# EAGLE board Qwiic_USB_Bridge_SAMD21E-Panel (EAGLE 9.5.2), part 1 of 2
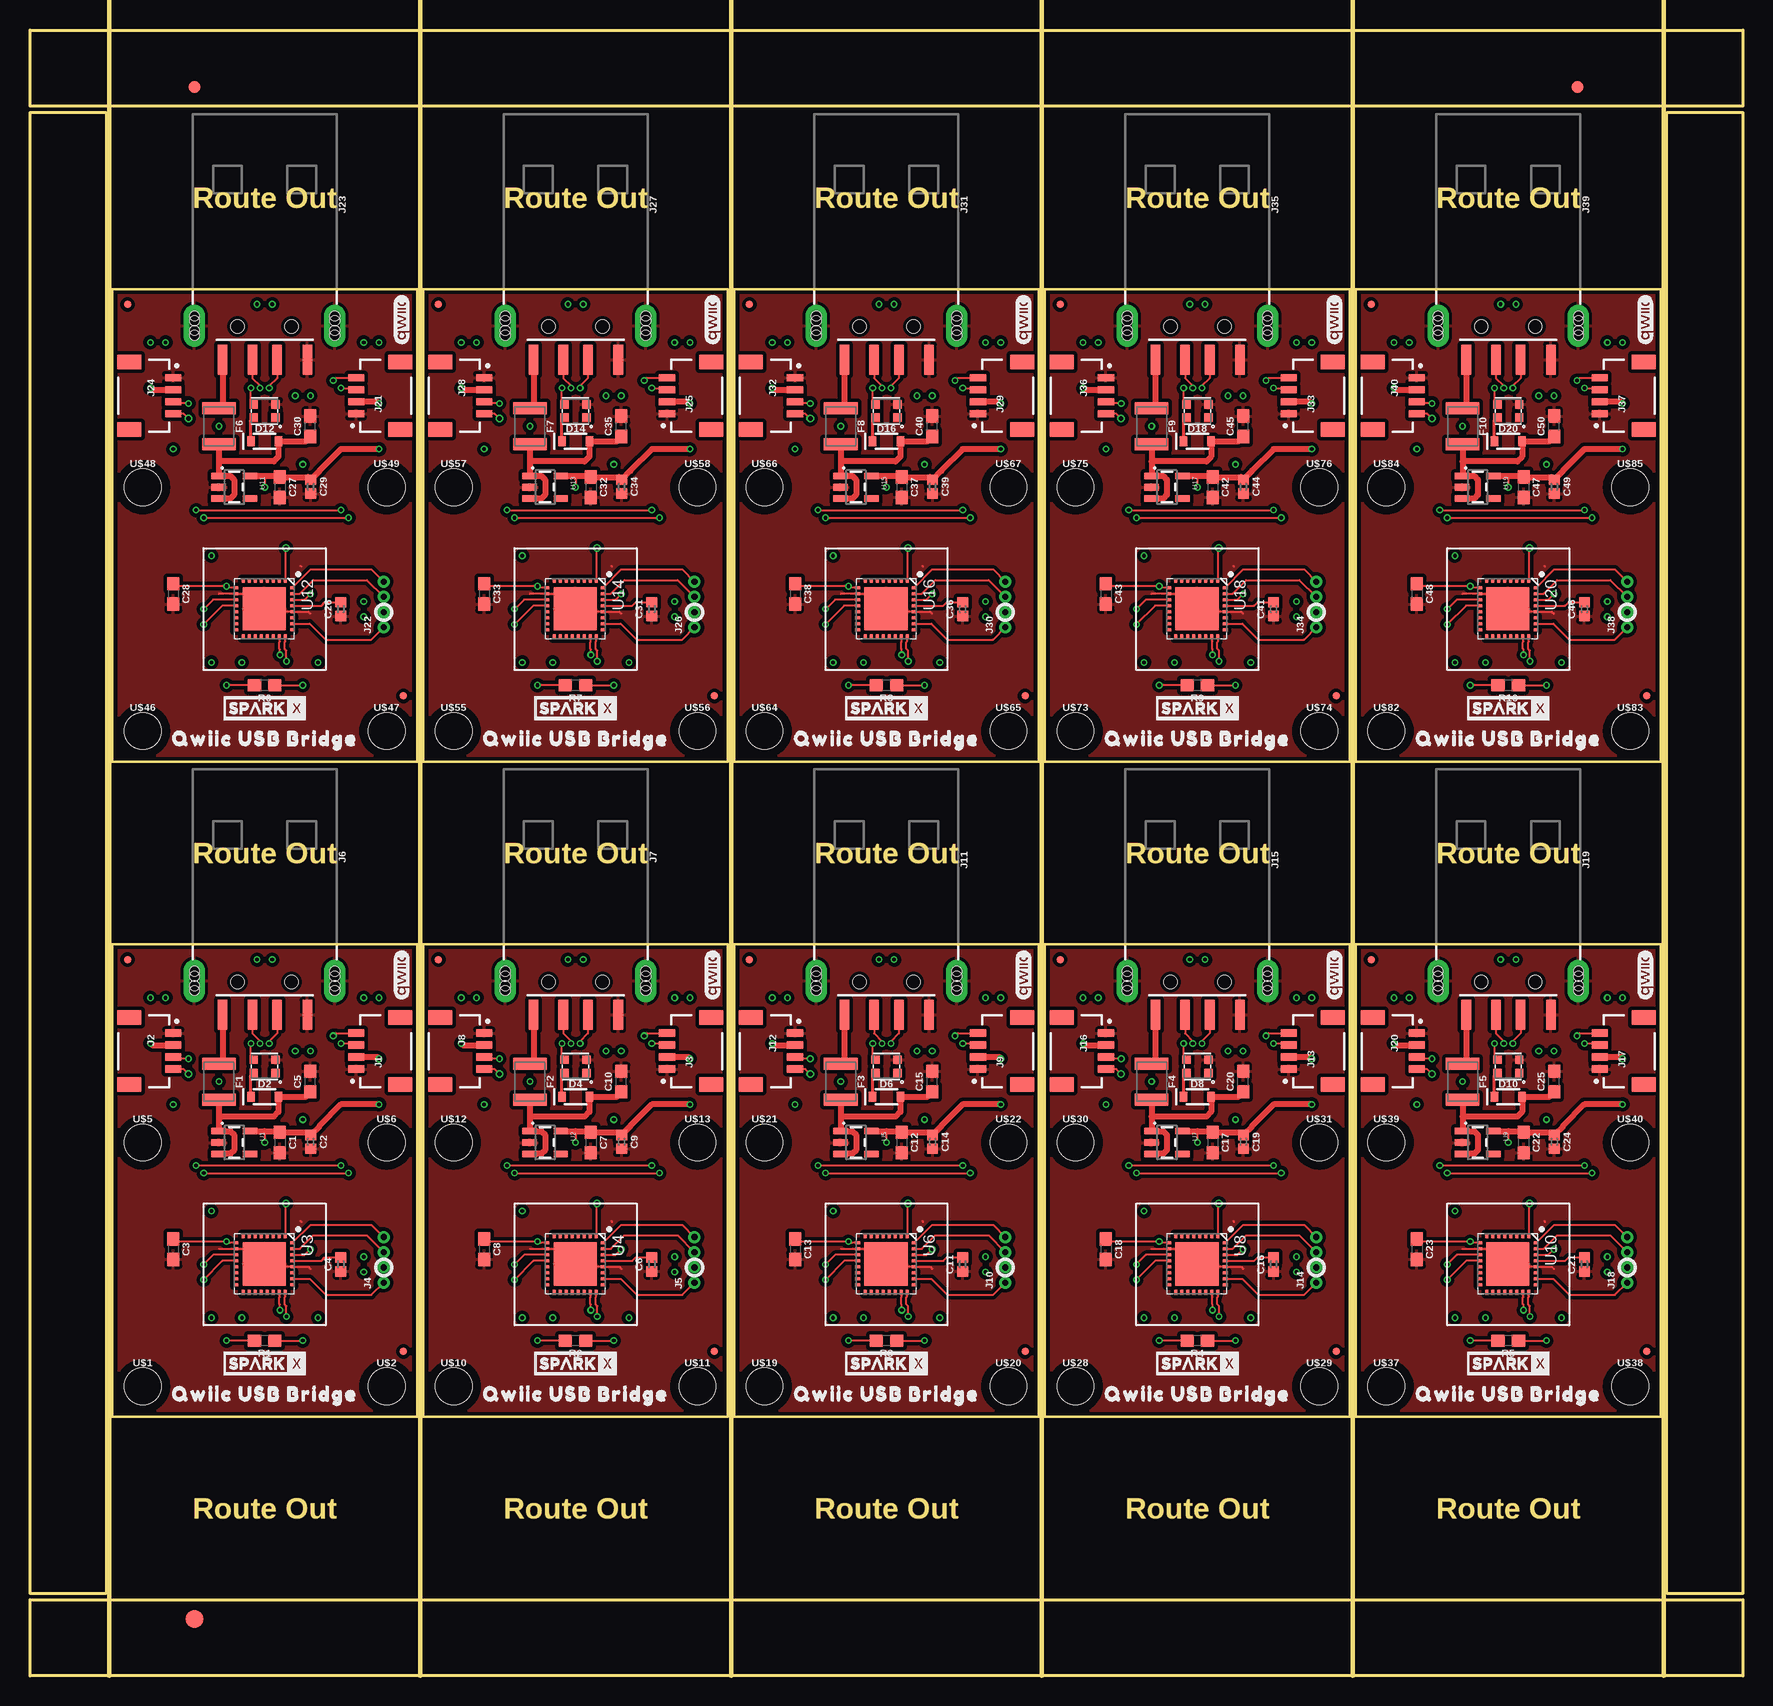
[diagram p0: board, top side]
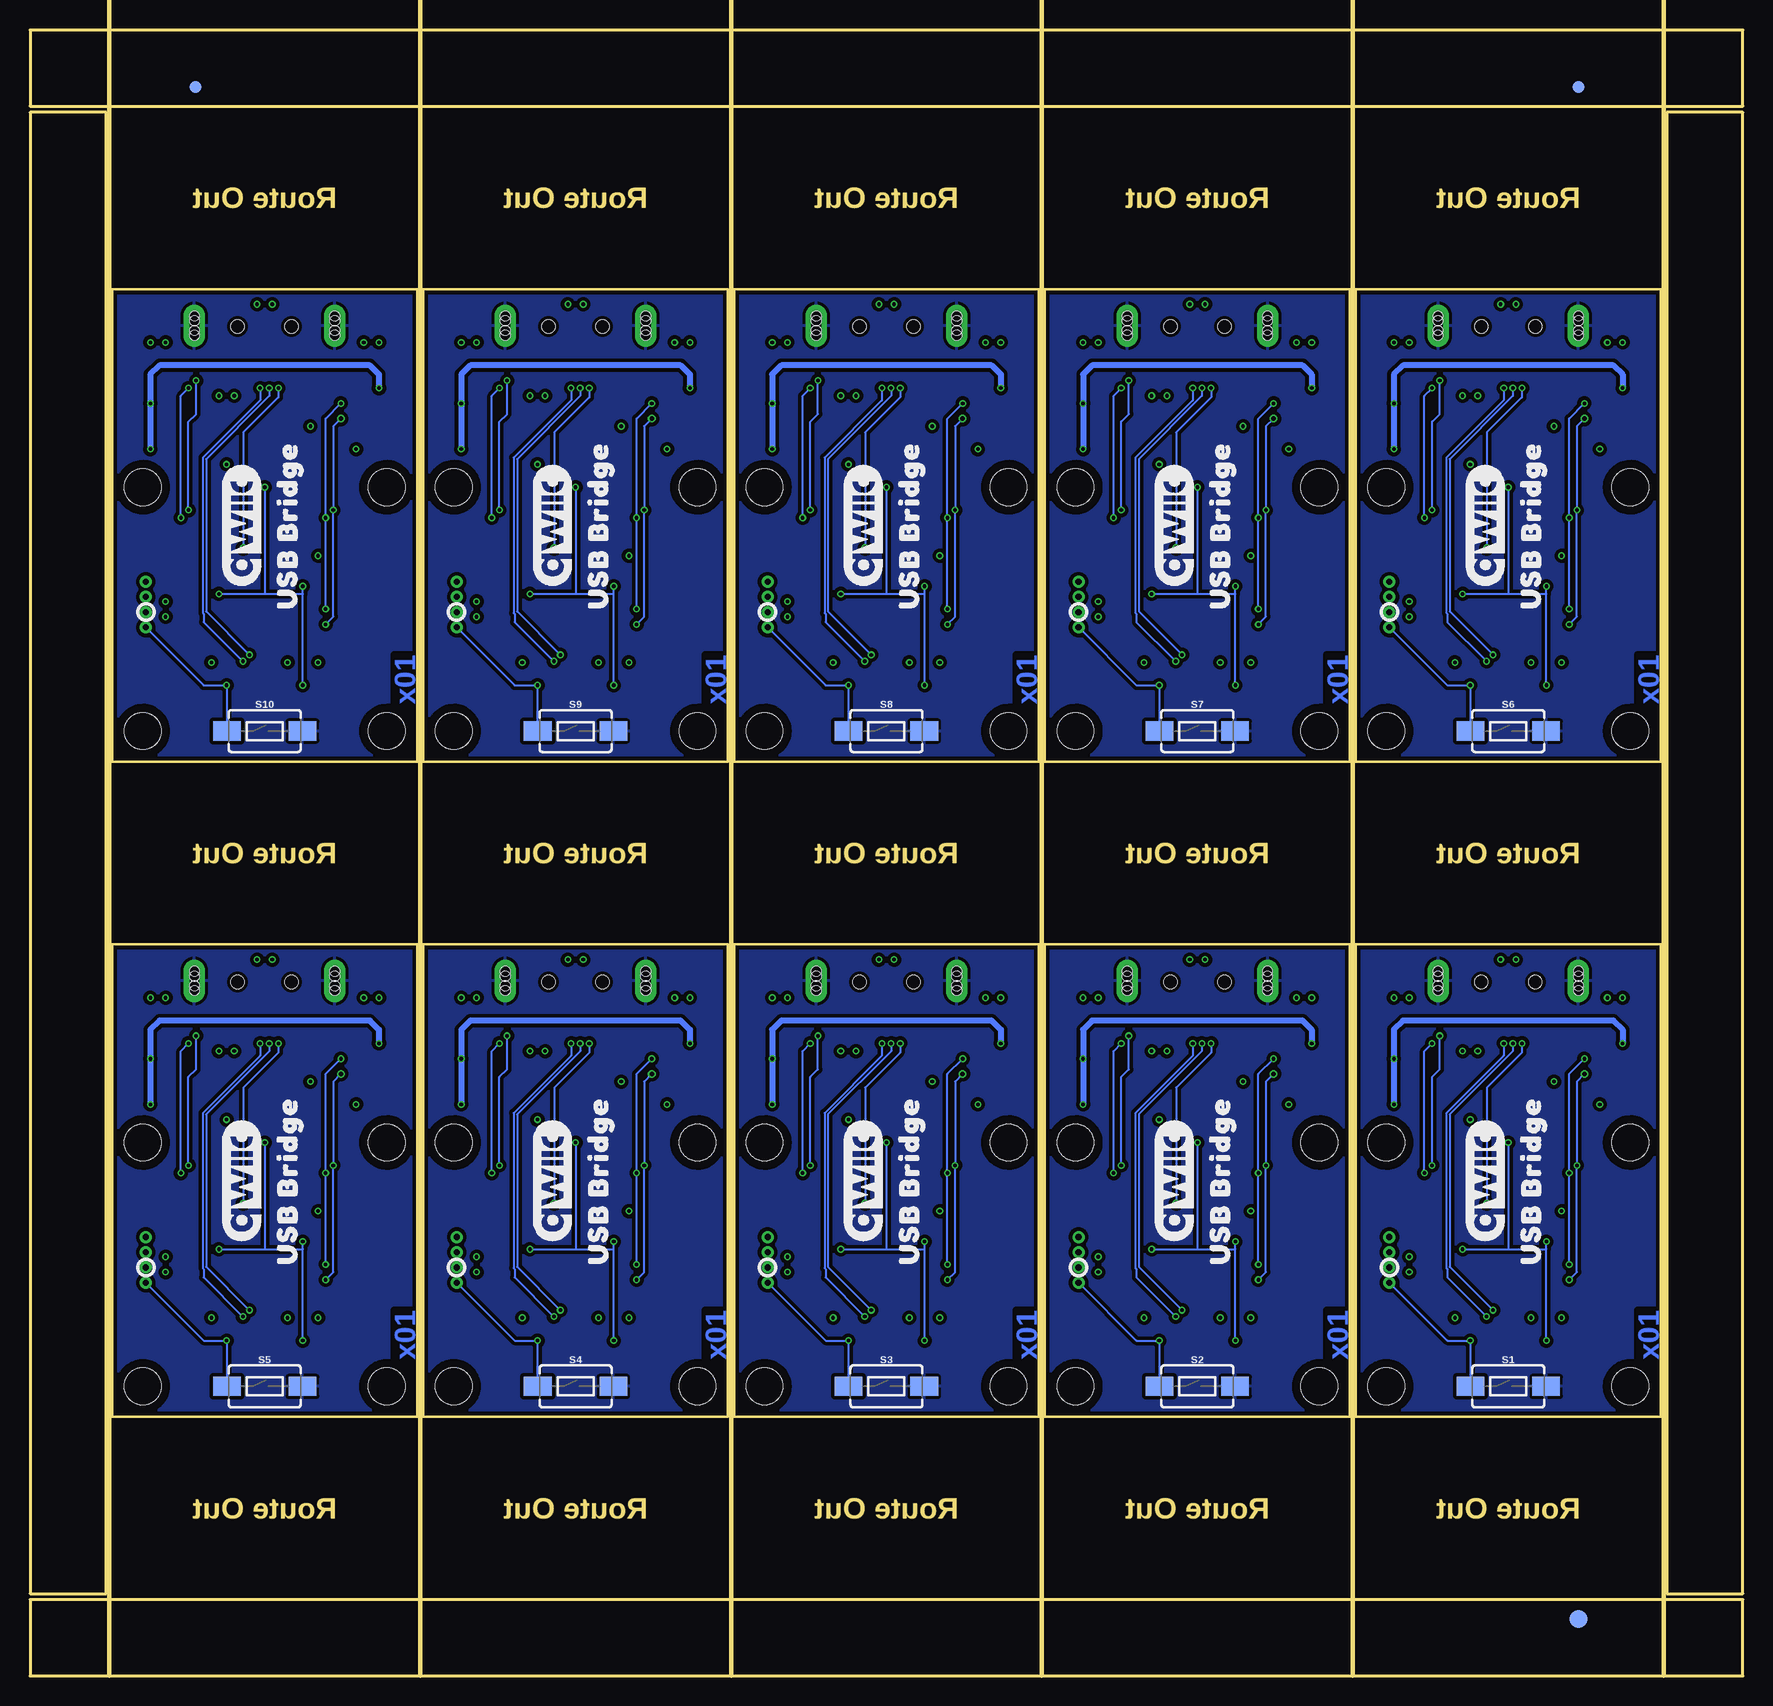
[diagram p1: board, bottom side, seen from below]

Size 142.75 x 137.16 mm. Coordinates in mm from the lower left corner, seen from the top.
Outline: 6.86,21.59 32.26,21.59 32.26,60.96 6.86,60.96 6.86,21.59
Outline: 32.77,21.59 58.17,21.59 58.17,60.96 32.77,60.96 32.77,21.59
Outline: 58.67,21.59 84.07,21.59 84.07,60.96 58.67,60.96 58.67,21.59
Outline: 84.58,21.59 109.98,21.59 109.98,60.96 84.58,60.96 84.58,21.59
Outline: 110.49,21.59 135.89,21.59 135.89,60.96 110.49,60.96 110.49,21.59
Outline: 6.86,76.2 32.26,76.2 32.26,115.57 6.86,115.57 6.86,76.2
Outline: 32.77,76.2 58.17,76.2 58.17,115.57 32.77,115.57 32.77,76.2
Outline: 58.67,76.2 84.07,76.2 84.07,115.57 58.67,115.57 58.67,76.2
Outline: 84.58,76.2 109.98,76.2 109.98,115.57 84.58,115.57 84.58,76.2
Outline: 110.49,76.2 135.89,76.2 135.89,115.57 110.49,115.57 110.49,76.2
Outline: 0,6.35 142.75,6.35 142.75,0 0,0 0,6.35
Outline: 136.4,130.3 142.75,130.3 142.75,6.86 136.4,6.86 136.4,130.3
Outline: 0,137.16 142.75,137.16 142.75,130.81 0,130.81 0,137.16
Outline: 0,130.3 6.35,130.3 6.35,6.86 0,6.86 0,130.3
Copper layers (1*16): Top 0.035mm / dielectric 1.5mm / Bottom 0.035mm
Design rules "Qwiic_USB_Bridge_SAMD21E": minimum track width 5mil, minimum drill 0.3mm, track to track 5mil, track to pad 5mil, pad to pad 5mil, via to via 5mil, smd to smd 5mil, copper to edge 7mil, drill to drill 7mil, minimum pad ring 5mil, minimum via ring 5mil, stop-mask expansion 4mil, vias tented up to drill 25mil, thermal gap 10mil
Milling: 6 lines

## Footprints (pad centres in the part's own frame; a part is rotated, then mirrored left to right if it is on the bottom)
0603 = smd 1.1 x 1: 1 -0.85,0; 2 0.85,0
0402 = smd 0.85 x 0.9: 1 -0.58,0; 2 0.58,0
WS2812-2020 = smd 0.7 x 0.7: DI -0.915,0.55; DO 0.915,-0.55; GND 0.915,0.55; VCC -0.915,-0.55
SOD-323 = smd 0.63 x 0.83: A 1.15,0; C -1.15,0
FIDUCIAL-1X2 = smd 1 x 1: 1 0,0
FIDUCIAL-1.5X3 = smd 1.5 x 1.5: 1 0,0
1210 = smd 1 x 2.8: 1 -1.5,0; 2 1.5,0
FIDUCIAL-MICRO = smd 0.635 x 0.635: 1 0,0
JST04_1MM_RA = smd 0.6 x 1.35: 1 -1.5,0; 2 -0.5,0; 3 0.5,0; 4 1.5,0 | smd 1.2 x 2: NC1 2.8,-3.675; NC2 -2.8,-3.675
1X04_1.27MM_NO_SILK = drill 0.508 pad 1: 1 0,0; 2 1.27,0; 3 2.54,0; 4 3.81,0
USB-A-SMT-MALE = smd 2.5 x 0.8: D+1 10.95,1.027; D-1 10.95,-1.027; GND1 10.95,3.551; VBUS1 10.95,-3.5 | drill 0.8 pad 1.778 long: SHLD1 8.13,-5.85; SHLD2 8.13,5.85 | hole 1.1: 8.2,2.25; 8.2,-2.25 | hole 0.8: 8.53,-5.85; 8.93,-5.85; 7.73,-5.85; 7.33,-5.85; 8.53,5.85; 8.93,5.85; 7.73,5.85; 7.33,5.85
TACTILE_SWITCH_SMD_6.0X3.5MM = smd 2.3 x 1.6: 1 -3.15,0; 2 3.15,0
SOT23-5 = smd 0.55 x 1.2: 1 -0.95,-1.3; 2 0,-1.3; 3 0.95,-1.3; 4 0.95,1.3; 5 -0.95,1.3
QFN-32_SAMD = smd 0.25 x 0.4: GND 0.21,2.31; GNDANA -1.29,-2.39; PA08 -0.79,-2.39; PA09 -0.29,-2.39; PA10 0.21,-2.39; PA11 0.71,-2.39; PA14 1.21,-2.39; PA15 1.71,-2.39; PA27 1.71,2.31; PA28 0.71,2.31; PA30 -1.29,2.31; PA31 -1.79,2.31; RES 1.21,2.31; VDD -1.79,-2.39; VDDCORE -0.29,2.31; VDDIN -0.79,2.31 | smd 0.4 x 0.25: PA00 -2.39,1.71; PA01 -2.39,1.21; PA02 -2.39,0.71; PA03 -2.39,0.21; PA04 -2.39,-0.29; PA05 -2.39,-0.79; PA06 -2.39,-1.29; PA07 -2.39,-1.79; PA16 2.31,-1.79; PA17 2.31,-1.29; PA18 2.31,-0.79; PA19 2.31,-0.29; PA22 2.31,0.21; PA23 2.31,0.71; PA24 2.31,1.21; PA25 2.31,1.71 | smd 3.6 x 3.6: PAD -0.04,-0.04
STAND-OFF-TIGHT = hole 3.048: 0,0

## Placement (x,y rotation side)
C1  10uF  [0603]  20.83,44.45 270 top
C2  1.0uF  [0402]  23.39,44.5 270 top
C3  10uF  [0603]  11.94,35.56 270 top
C4  1.0uF  [0402]  25.91,34.29 90 top
C5  0.1uF  [0603]  23.37,49.53 90 top
C6  1.0uF  [0402]  51.82,34.29 90 top
C7  10uF  [0603]  46.74,44.45 270 top
C8  10uF  [0603]  37.85,35.56 270 top
C9  1.0uF  [0402]  49.3,44.5 270 top
C10  0.1uF  [0603]  49.28,49.53 90 top
C11  1.0uF  [0402]  77.72,34.29 90 top
C12  10uF  [0603]  72.64,44.45 270 top
C13  10uF  [0603]  63.75,35.56 270 top
C14  1.0uF  [0402]  75.21,44.5 270 top
C15  0.1uF  [0603]  75.18,49.53 90 top
C16  1.0uF  [0402]  103.63,34.29 90 top
C17  10uF  [0603]  98.55,44.45 270 top
C18  10uF  [0603]  89.66,35.56 270 top
C19  1.0uF  [0402]  101.12,44.5 270 top
C20  0.1uF  [0603]  101.09,49.53 90 top
C21  1.0uF  [0402]  129.54,34.29 90 top
C22  10uF  [0603]  124.46,44.45 270 top
C23  10uF  [0603]  115.57,35.56 270 top
C24  1.0uF  [0402]  127.03,44.5 270 top
C25  0.1uF  [0603]  127,49.53 90 top
C26  1.0uF  [0402]  25.91,88.9 90 top
C27  10uF  [0603]  20.83,99.06 270 top
C28  10uF  [0603]  11.94,90.17 270 top
C29  1.0uF  [0402]  23.39,99.11 270 top
C30  0.1uF  [0603]  23.37,104.14 90 top
C31  1.0uF  [0402]  51.82,88.9 90 top
C32  10uF  [0603]  46.74,99.06 270 top
C33  10uF  [0603]  37.85,90.17 270 top
C34  1.0uF  [0402]  49.3,99.11 270 top
C35  0.1uF  [0603]  49.28,104.14 90 top
C36  1.0uF  [0402]  77.72,88.9 90 top
C37  10uF  [0603]  72.64,99.06 270 top
C38  10uF  [0603]  63.75,90.17 270 top
C39  1.0uF  [0402]  75.21,99.11 270 top
C40  0.1uF  [0603]  75.18,104.14 90 top
C41  1.0uF  [0402]  103.63,88.9 90 top
C42  10uF  [0603]  98.55,99.06 270 top
C43  10uF  [0603]  89.66,90.17 270 top
C44  1.0uF  [0402]  101.12,99.11 270 top
C45  0.1uF  [0603]  101.09,104.14 90 top
C46  1.0uF  [0402]  129.54,88.9 90 top
C47  10uF  [0603]  124.46,99.06 270 top
C48  10uF  [0603]  115.57,90.17 270 top
C49  1.0uF  [0402]  127.03,99.11 270 top
C50  0.1uF  [0603]  127,104.14 90 top
D1  WS2812_2020  [WS2812-2020]  19.56,50.8 0 top
D2  250mA/100V  [SOD-323]  19.56,48.26 0 top
D3  WS2812_2020  [WS2812-2020]  45.47,50.8 0 top
D4  250mA/100V  [SOD-323]  45.47,48.26 0 top
D5  WS2812_2020  [WS2812-2020]  71.37,50.8 0 top
D6  250mA/100V  [SOD-323]  71.37,48.26 0 top
D7  WS2812_2020  [WS2812-2020]  97.28,50.8 0 top
D8  250mA/100V  [SOD-323]  97.28,48.26 0 top
D9  WS2812_2020  [WS2812-2020]  123.19,50.8 0 top
D10  250mA/100V  [SOD-323]  123.19,48.26 0 top
D11  WS2812_2020  [WS2812-2020]  19.56,105.41 0 top
D12  250mA/100V  [SOD-323]  19.56,102.87 0 top
D13  WS2812_2020  [WS2812-2020]  45.47,105.41 0 top
D14  250mA/100V  [SOD-323]  45.47,102.87 0 top
D15  WS2812_2020  [WS2812-2020]  71.37,105.41 0 top
D16  250mA/100V  [SOD-323]  71.37,102.87 0 top
D17  WS2812_2020  [WS2812-2020]  97.28,105.41 0 top
D18  250mA/100V  [SOD-323]  97.28,102.87 0 top
D19  WS2812_2020  [WS2812-2020]  123.19,105.41 0 top
D20  250mA/100V  [SOD-323]  123.19,102.87 0 top
E$1  [FIDUCIAL-1X2]  13.72,132.4 0 top
E$2  [FIDUCIAL-1X2]  13.72,132.4 0 bottom
E$3  [FIDUCIAL-1X2]  128.97,132.4 0 top
E$4  [FIDUCIAL-1X2]  128.97,132.4 0 bottom
E$5  [FIDUCIAL-1.5X3]  13.72,4.76 0 top
E$6  [FIDUCIAL-1.5X3]  13.72,4.76 0 bottom
F1  6V/2A  [1210]  15.75,49.53 270 top
F2  6V/2A  [1210]  41.66,49.53 270 top
F3  6V/2A  [1210]  67.56,49.53 270 top
F4  6V/2A  [1210]  93.47,49.53 270 top
F5  6V/2A  [1210]  119.38,49.53 270 top
F6  6V/2A  [1210]  15.75,104.14 270 top
F7  6V/2A  [1210]  41.66,104.14 270 top
F8  6V/2A  [1210]  67.56,104.14 270 top
F9  6V/2A  [1210]  93.47,104.14 270 top
F10  6V/2A  [1210]  119.38,104.14 270 top
FD1  FIDUCIALUFIDUCIAL  [FIDUCIAL-MICRO]  8.13,59.69 0 top
FD2  FIDUCIALUFIDUCIAL  [FIDUCIAL-MICRO]  31.12,27.05 0 top
FD3  FIDUCIALUFIDUCIAL  [FIDUCIAL-MICRO]  34.04,59.69 0 top
FD4  FIDUCIALUFIDUCIAL  [FIDUCIAL-MICRO]  57.02,27.05 0 top
FD5  FIDUCIALUFIDUCIAL  [FIDUCIAL-MICRO]  59.94,59.69 0 top
FD6  FIDUCIALUFIDUCIAL  [FIDUCIAL-MICRO]  82.93,27.05 0 top
FD7  FIDUCIALUFIDUCIAL  [FIDUCIAL-MICRO]  85.85,59.69 0 top
FD8  FIDUCIALUFIDUCIAL  [FIDUCIAL-MICRO]  108.84,27.05 0 top
FD9  FIDUCIALUFIDUCIAL  [FIDUCIAL-MICRO]  111.76,59.69 0 top
FD10  FIDUCIALUFIDUCIAL  [FIDUCIAL-MICRO]  134.75,27.05 0 top
FD11  FIDUCIALUFIDUCIAL  [FIDUCIAL-MICRO]  8.13,114.3 0 top
FD12  FIDUCIALUFIDUCIAL  [FIDUCIAL-MICRO]  31.12,81.66 0 top
FD13  FIDUCIALUFIDUCIAL  [FIDUCIAL-MICRO]  34.04,114.3 0 top
FD14  FIDUCIALUFIDUCIAL  [FIDUCIAL-MICRO]  57.02,81.66 0 top
FD15  FIDUCIALUFIDUCIAL  [FIDUCIAL-MICRO]  59.94,114.3 0 top
FD16  FIDUCIALUFIDUCIAL  [FIDUCIAL-MICRO]  82.93,81.66 0 top
FD17  FIDUCIALUFIDUCIAL  [FIDUCIAL-MICRO]  85.85,114.3 0 top
FD18  FIDUCIALUFIDUCIAL  [FIDUCIAL-MICRO]  108.84,81.66 0 top
FD19  FIDUCIALUFIDUCIAL  [FIDUCIAL-MICRO]  111.76,114.3 0 top
FD20  FIDUCIALUFIDUCIAL  [FIDUCIAL-MICRO]  134.75,81.66 0 top
J1  QWIIC_RIGHT_ANGLE  [JST04_1MM_RA]  27.18,52.07 90 top
J2  QWIIC_RIGHT_ANGLE  [JST04_1MM_RA]  11.94,52.07 270 top
J3  QWIIC_RIGHT_ANGLE  [JST04_1MM_RA]  53.09,52.07 90 top
J4  [1X04_1.27MM_NO_SILK]  29.46,32.77 90 top
J5  [1X04_1.27MM_NO_SILK]  55.37,32.77 90 top
J6  USB_A_SMT_MALE  [USB-A-SMT-MALE]  19.56,66.04 270 top
J7  USB_A_SMT_MALE  [USB-A-SMT-MALE]  45.47,66.04 270 top
J8  QWIIC_RIGHT_ANGLE  [JST04_1MM_RA]  37.85,52.07 270 top
J9  QWIIC_RIGHT_ANGLE  [JST04_1MM_RA]  78.99,52.07 90 top
J10  [1X04_1.27MM_NO_SILK]  81.28,32.77 90 top
J11  USB_A_SMT_MALE  [USB-A-SMT-MALE]  71.37,66.04 270 top
J12  QWIIC_RIGHT_ANGLE  [JST04_1MM_RA]  63.75,52.07 270 top
J13  QWIIC_RIGHT_ANGLE  [JST04_1MM_RA]  104.9,52.07 90 top
J14  [1X04_1.27MM_NO_SILK]  107.19,32.77 90 top
J15  USB_A_SMT_MALE  [USB-A-SMT-MALE]  97.28,66.04 270 top
J16  QWIIC_RIGHT_ANGLE  [JST04_1MM_RA]  89.66,52.07 270 top
J17  QWIIC_RIGHT_ANGLE  [JST04_1MM_RA]  130.81,52.07 90 top
J18  [1X04_1.27MM_NO_SILK]  133.1,32.77 90 top
J19  USB_A_SMT_MALE  [USB-A-SMT-MALE]  123.19,66.04 270 top
J20  QWIIC_RIGHT_ANGLE  [JST04_1MM_RA]  115.57,52.07 270 top
J21  QWIIC_RIGHT_ANGLE  [JST04_1MM_RA]  27.18,106.68 90 top
J22  [1X04_1.27MM_NO_SILK]  29.46,87.38 90 top
J23  USB_A_SMT_MALE  [USB-A-SMT-MALE]  19.56,120.65 270 top
J24  QWIIC_RIGHT_ANGLE  [JST04_1MM_RA]  11.94,106.68 270 top
J25  QWIIC_RIGHT_ANGLE  [JST04_1MM_RA]  53.09,106.68 90 top
J26  [1X04_1.27MM_NO_SILK]  55.37,87.38 90 top
J27  USB_A_SMT_MALE  [USB-A-SMT-MALE]  45.47,120.65 270 top
J28  QWIIC_RIGHT_ANGLE  [JST04_1MM_RA]  37.85,106.68 270 top
J29  QWIIC_RIGHT_ANGLE  [JST04_1MM_RA]  78.99,106.68 90 top
J30  [1X04_1.27MM_NO_SILK]  81.28,87.38 90 top
J31  USB_A_SMT_MALE  [USB-A-SMT-MALE]  71.37,120.65 270 top
J32  QWIIC_RIGHT_ANGLE  [JST04_1MM_RA]  63.75,106.68 270 top
J33  QWIIC_RIGHT_ANGLE  [JST04_1MM_RA]  104.9,106.68 90 top
J34  [1X04_1.27MM_NO_SILK]  107.19,87.38 90 top
J35  USB_A_SMT_MALE  [USB-A-SMT-MALE]  97.28,120.65 270 top
J36  QWIIC_RIGHT_ANGLE  [JST04_1MM_RA]  89.66,106.68 270 top
J37  QWIIC_RIGHT_ANGLE  [JST04_1MM_RA]  130.81,106.68 90 top
J38  [1X04_1.27MM_NO_SILK]  133.1,87.38 90 top
J39  USB_A_SMT_MALE  [USB-A-SMT-MALE]  123.19,120.65 270 top
J40  QWIIC_RIGHT_ANGLE  [JST04_1MM_RA]  115.57,106.68 270 top
R1  10k  [0603]  19.56,27.94 180 top
R2  10k  [0603]  45.47,27.94 180 top
R3  10k  [0603]  71.37,27.94 180 top
R4  10k  [0603]  97.28,27.94 180 top
R5  10k  [0603]  123.19,27.94 180 top
R6  10k  [0603]  19.56,82.55 180 top
R7  10k  [0603]  45.47,82.55 180 top
R8  10k  [0603]  71.37,82.55 180 top
R9  10k  [0603]  97.28,82.55 180 top
R10  10k  [0603]  123.19,82.55 180 top
S1  MOMENTARY-SWITCH-SPST-SMD-6.0X3.5MM  [TACTILE_SWITCH_SMD_6.0X3.5MM]  19.56,24.13 0 bottom
S2  MOMENTARY-SWITCH-SPST-SMD-6.0X3.5MM  [TACTILE_SWITCH_SMD_6.0X3.5MM]  45.47,24.13 0 bottom
S3  MOMENTARY-SWITCH-SPST-SMD-6.0X3.5MM  [TACTILE_SWITCH_SMD_6.0X3.5MM]  71.37,24.13 0 bottom
S4  MOMENTARY-SWITCH-SPST-SMD-6.0X3.5MM  [TACTILE_SWITCH_SMD_6.0X3.5MM]  97.28,24.13 0 bottom
S5  MOMENTARY-SWITCH-SPST-SMD-6.0X3.5MM  [TACTILE_SWITCH_SMD_6.0X3.5MM]  123.19,24.13 0 bottom
S6  MOMENTARY-SWITCH-SPST-SMD-6.0X3.5MM  [TACTILE_SWITCH_SMD_6.0X3.5MM]  19.56,78.74 0 bottom
S7  MOMENTARY-SWITCH-SPST-SMD-6.0X3.5MM  [TACTILE_SWITCH_SMD_6.0X3.5MM]  45.47,78.74 0 bottom
S8  MOMENTARY-SWITCH-SPST-SMD-6.0X3.5MM  [TACTILE_SWITCH_SMD_6.0X3.5MM]  71.37,78.74 0 bottom
S9  MOMENTARY-SWITCH-SPST-SMD-6.0X3.5MM  [TACTILE_SWITCH_SMD_6.0X3.5MM]  97.28,78.74 0 bottom
S10  MOMENTARY-SWITCH-SPST-SMD-6.0X3.5MM  [TACTILE_SWITCH_SMD_6.0X3.5MM]  123.19,78.74 0 bottom
U1  3.3V  [SOT23-5]  17.02,44.45 270 top
U2  3.3V  [SOT23-5]  42.93,44.45 270 top
U3  ATSAMD21E18A-U  [QFN-32_SAMD]  19.56,34.29 270 top
U4  ATSAMD21E18A-U  [QFN-32_SAMD]  45.47,34.29 270 top
U5  3.3V  [SOT23-5]  68.83,44.45 270 top
U6  ATSAMD21E18A-U  [QFN-32_SAMD]  71.37,34.29 270 top
U7  3.3V  [SOT23-5]  94.74,44.45 270 top
U8  ATSAMD21E18A-U  [QFN-32_SAMD]  97.28,34.29 270 top
U9  3.3V  [SOT23-5]  120.65,44.45 270 top
U10  ATSAMD21E18A-U  [QFN-32_SAMD]  123.19,34.29 270 top
U11  3.3V  [SOT23-5]  17.02,99.06 270 top
U12  ATSAMD21E18A-U  [QFN-32_SAMD]  19.56,88.9 270 top
U13  3.3V  [SOT23-5]  42.93,99.06 270 top
U14  ATSAMD21E18A-U  [QFN-32_SAMD]  45.47,88.9 270 top
U15  3.3V  [SOT23-5]  68.83,99.06 270 top
U16  ATSAMD21E18A-U  [QFN-32_SAMD]  71.37,88.9 270 top
U17  3.3V  [SOT23-5]  94.74,99.06 270 top
U18  ATSAMD21E18A-U  [QFN-32_SAMD]  97.28,88.9 270 top
U19  3.3V  [SOT23-5]  120.65,99.06 270 top
U20  ATSAMD21E18A-U  [QFN-32_SAMD]  123.19,88.9 270 top
U$1  [STAND-OFF-TIGHT]  9.4,24.13 0 top
U$2  [STAND-OFF-TIGHT]  29.72,24.13 0 top
U$3  [QWIIC_USB_BRIDGE0]  19.56,23.5 0 top
U$4  [SPARKX-SMALL]  19.56,26.04 0 top
U$5  [STAND-OFF-TIGHT]  9.4,44.45 0 top
U$6  [STAND-OFF-TIGHT]  29.72,44.45 0 top
U$7  [QWIIC_10MM]  21.46,41.27 90 bottom
U$8  [USB_BRIDGE0]  17.65,41.27 90 bottom
U$9  [QWIIC_4MM]  30.99,58.42 90 top
U$10  [STAND-OFF-TIGHT]  35.31,24.13 0 top
U$11  [STAND-OFF-TIGHT]  55.63,24.13 0 top
U$12  [STAND-OFF-TIGHT]  35.31,44.45 0 top
U$13  [STAND-OFF-TIGHT]  55.63,44.45 0 top
U$14  [QWIIC_USB_BRIDGE0]  45.47,23.5 0 top
U$15  [SPARKX-SMALL]  45.47,26.04 0 top
U$16  [QWIIC_10MM]  47.37,41.27 90 bottom
U$17  [USB_BRIDGE0]  43.56,41.27 90 bottom
U$18  [QWIIC_4MM]  56.9,58.42 90 top
U$19  [STAND-OFF-TIGHT]  61.21,24.13 0 top
U$20  [STAND-OFF-TIGHT]  81.53,24.13 0 top
U$21  [STAND-OFF-TIGHT]  61.21,44.45 0 top
U$22  [STAND-OFF-TIGHT]  81.53,44.45 0 top
U$23  [QWIIC_USB_BRIDGE0]  71.37,23.5 0 top
U$24  [SPARKX-SMALL]  71.37,26.04 0 top
U$25  [QWIIC_10MM]  73.28,41.27 90 bottom
U$26  [USB_BRIDGE0]  69.47,41.27 90 bottom
U$27  [QWIIC_4MM]  82.8,58.42 90 top
U$28  [STAND-OFF-TIGHT]  87.12,24.13 0 top
U$29  [STAND-OFF-TIGHT]  107.44,24.13 0 top
U$30  [STAND-OFF-TIGHT]  87.12,44.45 0 top
U$31  [STAND-OFF-TIGHT]  107.44,44.45 0 top
U$32  [QWIIC_USB_BRIDGE0]  97.28,23.5 0 top
U$33  [SPARKX-SMALL]  97.28,26.04 0 top
U$34  [QWIIC_10MM]  99.19,41.27 90 bottom
U$35  [USB_BRIDGE0]  95.38,41.27 90 bottom
U$36  [QWIIC_4MM]  108.71,58.42 90 top
U$37  [STAND-OFF-TIGHT]  113.03,24.13 0 top
U$38  [STAND-OFF-TIGHT]  133.35,24.13 0 top
U$39  [STAND-OFF-TIGHT]  113.03,44.45 0 top
U$40  [STAND-OFF-TIGHT]  133.35,44.45 0 top
U$41  [QWIIC_USB_BRIDGE0]  123.19,23.5 0 top
U$42  [SPARKX-SMALL]  123.19,26.04 0 top
U$43  [QWIIC_10MM]  125.09,41.27 90 bottom
U$44  [USB_BRIDGE0]  121.29,41.27 90 bottom
U$45  [QWIIC_4MM]  134.62,58.42 90 top
U$46  [STAND-OFF-TIGHT]  9.4,78.74 0 top
U$47  [STAND-OFF-TIGHT]  29.72,78.74 0 top
U$48  [STAND-OFF-TIGHT]  9.4,99.06 0 top
U$49  [STAND-OFF-TIGHT]  29.72,99.06 0 top
U$50  [QWIIC_USB_BRIDGE0]  19.56,78.11 0 top
U$51  [SPARKX-SMALL]  19.56,80.64 0 top
U$52  [QWIIC_10MM]  21.46,95.89 90 bottom
U$53  [USB_BRIDGE0]  17.65,95.89 90 bottom
U$54  [QWIIC_4MM]  30.99,113.03 90 top
U$55  [STAND-OFF-TIGHT]  35.31,78.74 0 top
U$56  [STAND-OFF-TIGHT]  55.63,78.74 0 top
U$57  [STAND-OFF-TIGHT]  35.31,99.06 0 top
U$58  [STAND-OFF-TIGHT]  55.63,99.06 0 top
U$59  [QWIIC_USB_BRIDGE0]  45.47,78.11 0 top
U$60  [SPARKX-SMALL]  45.47,80.64 0 top
U$61  [QWIIC_10MM]  47.37,95.89 90 bottom
U$62  [USB_BRIDGE0]  43.56,95.89 90 bottom
U$63  [QWIIC_4MM]  56.9,113.03 90 top
U$64  [STAND-OFF-TIGHT]  61.21,78.74 0 top
U$65  [STAND-OFF-TIGHT]  81.53,78.74 0 top
U$66  [STAND-OFF-TIGHT]  61.21,99.06 0 top
U$67  [STAND-OFF-TIGHT]  81.53,99.06 0 top
U$68  [QWIIC_USB_BRIDGE0]  71.37,78.11 0 top
U$69  [SPARKX-SMALL]  71.37,80.64 0 top
U$70  [QWIIC_10MM]  73.28,95.89 90 bottom
U$71  [USB_BRIDGE0]  69.47,95.89 90 bottom
U$72  [QWIIC_4MM]  82.8,113.03 90 top
U$73  [STAND-OFF-TIGHT]  87.12,78.74 0 top
U$74  [STAND-OFF-TIGHT]  107.44,78.74 0 top
U$75  [STAND-OFF-TIGHT]  87.12,99.06 0 top
U$76  [STAND-OFF-TIGHT]  107.44,99.06 0 top
U$77  [QWIIC_USB_BRIDGE0]  97.28,78.11 0 top
U$78  [SPARKX-SMALL]  97.28,80.64 0 top
U$79  [QWIIC_10MM]  99.19,95.89 90 bottom
U$80  [USB_BRIDGE0]  95.38,95.89 90 bottom
U$81  [QWIIC_4MM]  108.71,113.03 90 top
U$82  [STAND-OFF-TIGHT]  113.03,78.74 0 top
U$83  [STAND-OFF-TIGHT]  133.35,78.74 0 top
U$84  [STAND-OFF-TIGHT]  113.03,99.06 0 top
U$85  [STAND-OFF-TIGHT]  133.35,99.06 0 top
U$86  [QWIIC_USB_BRIDGE0]  123.19,78.11 0 top
U$87  [SPARKX-SMALL]  123.19,80.64 0 top
U$88  [QWIIC_10MM]  125.09,95.89 90 bottom
U$89  [USB_BRIDGE0]  121.29,95.89 90 bottom
U$90  [QWIIC_4MM]  134.62,113.03 90 top

## Library data of the parts
C1 C3 C7 C8 C12 C13 C17 C18 C22 C23 C27 C28 C32 C33 C37 C38 C42 C43 C47 C48 = SparkFun-Capacitors; PROD_ID: CAP-11015
C2 C4 C6 C9 C11 C14 C16 C19 C21 C24 C26 C29 C31 C34 C36 C39 C41 C44 C46 C49 = SparkFun-Capacitors; PROD_ID: CAP-12417
C5 C10 C15 C20 C25 C30 C35 C40 C45 C50 = SparkFun-Capacitors; PROD_ID: CAP-00810
D1 D3 D5 D7 D9 D11 D13 D15 D17 D19 = SparkFun-LED; PROD_ID: DIO-15591
D2 D4 D6 D8 D10 D12 D14 D16 D18 D20 = SparkFun-DiscreteSemi; PROD_ID: DIO-09646
E$1-E$4 FD1-FD20 U$7 U$9 U$16 U$18 U$25 U$27 U$34 U$36 U$43 U$45 U$52 U$54 U$61 U$63 U$70 U$72 U$79 U$81 U$88 U$90 = SparkFun-Aesthetics
E$5 E$6 = SparkFun-Retired
F1-F10 = SparkFun-Fuses; PROD_ID: RES-14313
J1-J3 J8 J9 J12 J13 J16 J17 J20 J21 J24 J25 J28 J29 J32 J33 J36 J37 J40 = SparkFun-Connectors; PROD_ID: CONN-13694
J4 J5 J10 J14 J18 J22 J26 J30 J34 J38 = SparkFun-Connectors
J6 J7 J11 J15 J19 J23 J27 J31 J35 J39 = SparkFun-Connectors; PROD_ID: CONN-11499
R1-R10 = SparkFun-Resistors; PROD_ID: RES-00824
S1-S10 = SparkFun-Switches; PROD_ID: SWCH-14278; SF_SKU: COM-08229
U1 U2 U5 U7 U9 U11 U13 U15 U17 U19 = SparkFun-IC-Power; PROD_ID: VREG-12457
U3 U4 U6 U8 U10 U12 U14 U16 U18 U20 = SparkFun-IC-Microcontroller; PROD_ID: IC-14428
U$1 U$2 U$5 U$6 U$10-U$13 U$19-U$22 U$28-U$31 U$37-U$40 U$46-U$49 U$55-U$58 U$64-U$67 U$73-U$76 U$82-U$85 = SparkFun-Hardware
U$3 U$8 U$14 U$17 U$23 U$26 U$32 U$35 U$41 U$44 U$50 U$53 U$59 U$62 U$68 U$71 U$77 U$80 U$86 U$89 = output
U$4 U$15 U$24 U$33 U$42 U$51 U$60 U$69 U$78 U$87 = SparkX

## Nets
3.3V: C1.1 C2.1 C3.1 J1.2 J2.2 R1.2 U1.5 U3.VDD U3.VDDIN
3.3V1: C7.1 C8.1 C9.1 J3.2 J8.2 R2.2 U2.5 U4.VDD U4.VDDIN
3.3V2: C12.1 C13.1 C14.1 J9.2 J12.2 R3.2 U5.5 U6.VDD U6.VDDIN
3.3V3: C17.1 C18.1 C19.1 J13.2 J16.2 R4.2 U7.5 U8.VDD U8.VDDIN
3.3V4: C22.1 C23.1 C24.1 J17.2 J20.2 R5.2 U9.5 U10.VDD U10.VDDIN
3.3V5: C27.1 C28.1 C29.1 J21.2 J24.2 R6.2 U11.5 U12.VDD U12.VDDIN
3.3V6: C32.1 C33.1 C34.1 J25.2 J28.2 R7.2 U13.5 U14.VDD U14.VDDIN
3.3V7: C37.1 C38.1 C39.1 J29.2 J32.2 R8.2 U15.5 U16.VDD U16.VDDIN
3.3V8: C42.1 C43.1 C44.1 J33.2 J36.2 R9.2 U17.5 U18.VDD U18.VDDIN
3.3V9: C47.1 C48.1 C49.1 J37.2 J40.2 R10.2 U19.5 U20.VDD U20.VDDIN
!RESET: J4.1 R1.1 S1.1 U3.RES
!RESET1: J5.1 R2.1 S2.1 U4.RES
!RESET2: J10.1 R3.1 S3.1 U6.RES
!RESET3: J14.1 R4.1 S4.1 U8.RES
!RESET4: J18.1 R5.1 S5.1 U10.RES
!RESET5: J22.1 R6.1 S6.1 U12.RES
!RESET6: J26.1 R7.1 S7.1 U14.RES
!RESET7: J30.1 R8.1 S8.1 U16.RES
!RESET8: J34.1 R9.1 S9.1 U18.RES
!RESET9: J38.1 R10.1 S10.1 U20.RES
FLASH_CS: U3.PA19
FLASH_CS1: U4.PA19
FLASH_CS2: U6.PA19
FLASH_CS3: U8.PA19
FLASH_CS4: U10.PA19
FLASH_CS5: U12.PA19
FLASH_CS6: U14.PA19
FLASH_CS7: U16.PA19
FLASH_CS8: U18.PA19
FLASH_CS9: U20.PA19
FLASH_MISO: U3.PA18
FLASH_MISO1: U4.PA18
FLASH_MISO2: U6.PA18
FLASH_MISO3: U8.PA18
FLASH_MISO4: U10.PA18
FLASH_MISO5: U12.PA18
FLASH_MISO6: U14.PA18
FLASH_MISO7: U16.PA18
FLASH_MISO8: U18.PA18
FLASH_MISO9: U20.PA18
FLASH_MOSI: U3.PA16
FLASH_MOSI1: U4.PA16
FLASH_MOSI2: U6.PA16
FLASH_MOSI3: U8.PA16
FLASH_MOSI4: U10.PA16
FLASH_MOSI5: U12.PA16
FLASH_MOSI6: U14.PA16
FLASH_MOSI7: U16.PA16
FLASH_MOSI8: U18.PA16
FLASH_MOSI9: U20.PA16
FLASH_SCK: U3.PA17
FLASH_SCK1: U4.PA17
FLASH_SCK2: U6.PA17
FLASH_SCK3: U8.PA17
FLASH_SCK4: U10.PA17
FLASH_SCK5: U12.PA17
FLASH_SCK6: U14.PA17
FLASH_SCK7: U16.PA17
FLASH_SCK8: U18.PA17
FLASH_SCK9: U20.PA17
GND: C1.2 C2.2 C3.2 C4.1 C5.2 D1.GND J1.1 J2.1 J4.2 J6.GND1 J6.SHLD1 J6.SHLD2 S1.2 U1.2 U3.GND U3.GNDANA U3.PAD
GND1: C6.1 C7.2 C8.2 C9.2 C10.2 D3.GND J3.1 J5.2 J7.GND1 J7.SHLD1 J7.SHLD2 J8.1 S2.2 U2.2 U4.GND U4.GNDANA U4.PAD
GND2: C11.1 C12.2 C13.2 C14.2 C15.2 D5.GND J9.1 J10.2 J11.GND1 J11.SHLD1 J11.SHLD2 J12.1 S3.2 U5.2 U6.GND U6.GNDANA U6.PAD
GND3: C16.1 C17.2 C18.2 C19.2 C20.2 D7.GND J13.1 J14.2 J15.GND1 J15.SHLD1 J15.SHLD2 J16.1 S4.2 U7.2 U8.GND U8.GNDANA U8.PAD
GND4: C21.1 C22.2 C23.2 C24.2 C25.2 D9.GND J17.1 J18.2 J19.GND1 J19.SHLD1 J19.SHLD2 J20.1 S5.2 U9.2 U10.GND U10.GNDANA U10.PAD
GND5: C26.1 C27.2 C28.2 C29.2 C30.2 D11.GND J21.1 J22.2 J23.GND1 J23.SHLD1 J23.SHLD2 J24.1 S6.2 U11.2 U12.GND U12.GNDANA U12.PAD
GND6: C31.1 C32.2 C33.2 C34.2 C35.2 D13.GND J25.1 J26.2 J27.GND1 J27.SHLD1 J27.SHLD2 J28.1 S7.2 U13.2 U14.GND U14.GNDANA U14.PAD
GND7: C36.1 C37.2 C38.2 C39.2 C40.2 D15.GND J29.1 J30.2 J31.GND1 J31.SHLD1 J31.SHLD2 J32.1 S8.2 U15.2 U16.GND U16.GNDANA U16.PAD
GND8: C41.1 C42.2 C43.2 C44.2 C45.2 D17.GND J33.1 J34.2 J35.GND1 J35.SHLD1 J35.SHLD2 J36.1 S9.2 U17.2 U18.GND U18.GNDANA U18.PAD
GND9: C46.1 C47.2 C48.2 C49.2 C50.2 D19.GND J37.1 J38.2 J39.GND1 J39.SHLD1 J39.SHLD2 J40.1 S10.2 U19.2 U20.GND U20.GNDANA U20.PAD
LED_IN: D1.DI U3.PA00
LED_IN1: D3.DI U4.PA00
LED_IN2: D5.DI U6.PA00
LED_IN3: D7.DI U8.PA00
LED_IN4: D9.DI U10.PA00
LED_IN5: D11.DI U12.PA00
LED_IN6: D13.DI U14.PA00
LED_IN7: D15.DI U16.PA00
LED_IN8: D17.DI U18.PA00
LED_IN9: D19.DI U20.PA00
MISO: U3.PA05
MISO1: U4.PA05
MISO2: U6.PA05
MISO3: U8.PA05
MISO4: U10.PA05
MISO5: U12.PA05
MISO6: U14.PA05
MISO7: U16.PA05
MISO8: U18.PA05
MISO9: U20.PA05
MOSI: U3.PA06
MOSI1: U4.PA06
MOSI2: U6.PA06
MOSI3: U8.PA06
MOSI4: U10.PA06
MOSI5: U12.PA06
MOSI6: U14.PA06
MOSI7: U16.PA06
MOSI8: U18.PA06
MOSI9: U20.PA06
N$1: F1.1 J6.VBUS1
N$2: D1.VCC D2.C
N$20: D3.VCC D4.C
N$21: F2.1 J7.VBUS1
N$39: D5.VCC D6.C
N$40: F3.1 J11.VBUS1
N$58: D7.VCC D8.C
N$59: F4.1 J15.VBUS1
N$77: D9.VCC D10.C
N$78: F5.1 J19.VBUS1
N$96: D11.VCC D12.C
N$97: F6.1 J23.VBUS1
N$115: D13.VCC D14.C
N$116: F7.1 J27.VBUS1
N$134: D15.VCC D16.C
N$135: F8.1 J31.VBUS1
N$153: D17.VCC D18.C
N$154: F9.1 J35.VBUS1
N$172: D19.VCC D20.C
N$173: F10.1 J39.VBUS1
RX: U3.PA23
RX1: U4.PA23
RX2: U6.PA23
RX3: U8.PA23
RX4: U10.PA23
RX5: U12.PA23
RX6: U14.PA23
RX7: U16.PA23
RX8: U18.PA23
RX9: U20.PA23
SCK: U3.PA07
SCK1: U4.PA07
SCK2: U6.PA07
SCK3: U8.PA07
SCK4: U10.PA07
SCK5: U12.PA07
SCK6: U14.PA07
SCK7: U16.PA07
SCK8: U18.PA07
SCK9: U20.PA07
SCL: J1.4 J2.4 U3.PA09
SCL1: J3.4 J8.4 U4.PA09
SCL2: J9.4 J12.4 U6.PA09
SCL3: J13.4 J16.4 U8.PA09
SCL4: J17.4 J20.4 U10.PA09
SCL5: J21.4 J24.4 U12.PA09
SCL6: J25.4 J28.4 U14.PA09
SCL7: J29.4 J32.4 U16.PA09
SCL8: J33.4 J36.4 U18.PA09
SCL9: J37.4 J40.4 U20.PA09
SDA: J1.3 J2.3 U3.PA08
SDA1: J3.3 J8.3 U4.PA08
SDA2: J9.3 J12.3 U6.PA08
SDA3: J13.3 J16.3 U8.PA08
SDA4: J17.3 J20.3 U10.PA08
SDA5: J21.3 J24.3 U12.PA08
SDA6: J25.3 J28.3 U14.PA08
SDA7: J29.3 J32.3 U16.PA08
SDA8: J33.3 J36.3 U18.PA08
SDA9: J37.3 J40.3 U20.PA08
SWCLK: J4.3 U3.PA30
SWCLK1: J5.3 U4.PA30
SWCLK2: J10.3 U6.PA30
SWCLK3: J14.3 U8.PA30
SWCLK4: J18.3 U10.PA30
SWCLK5: J22.3 U12.PA30
SWCLK6: J26.3 U14.PA30
SWCLK7: J30.3 U16.PA30
SWCLK8: J34.3 U18.PA30
SWCLK9: J38.3 U20.PA30
SWDIO: J4.4 U3.PA31
SWDIO1: J5.4 U4.PA31
SWDIO2: J10.4 U6.PA31
SWDIO3: J14.4 U8.PA31
SWDIO4: J18.4 U10.PA31
SWDIO5: J22.4 U12.PA31
SWDIO6: J26.4 U14.PA31
SWDIO7: J30.4 U16.PA31
SWDIO8: J34.4 U18.PA31
SWDIO9: J38.4 U20.PA31
TX: U3.PA22
TX1: U4.PA22
TX2: U6.PA22
TX3: U8.PA22
TX4: U10.PA22
TX5: U12.PA22
TX6: U14.PA22
TX7: U16.PA22
TX8: U18.PA22
TX9: U20.PA22
USB_N: J6.D-1 U3.PA24
USB_N1: J7.D-1 U4.PA24
USB_N2: J11.D-1 U6.PA24
USB_N3: J15.D-1 U8.PA24
USB_N4: J19.D-1 U10.PA24
USB_N5: J23.D-1 U12.PA24
USB_N6: J27.D-1 U14.PA24
USB_N7: J31.D-1 U16.PA24
USB_N8: J35.D-1 U18.PA24
USB_N9: J39.D-1 U20.PA24
USB_P: J6.D+1 U3.PA25
USB_P1: J7.D+1 U4.PA25
USB_P2: J11.D+1 U6.PA25
USB_P3: J15.D+1 U8.PA25
USB_P4: J19.D+1 U10.PA25
USB_P5: J23.D+1 U12.PA25
USB_P6: J27.D+1 U14.PA25
USB_P7: J31.D+1 U16.PA25
USB_P8: J35.D+1 U18.PA25
USB_P9: J39.D+1 U20.PA25
VDDCORE: C4.2 U3.VDDCORE
VDDCORE1: C6.2 U4.VDDCORE
VDDCORE2: C11.2 U6.VDDCORE
VDDCORE3: C16.2 U8.VDDCORE
VDDCORE4: C21.2 U10.VDDCORE
VDDCORE5: C26.2 U12.VDDCORE
VDDCORE6: C31.2 U14.VDDCORE
VDDCORE7: C36.2 U16.VDDCORE
VDDCORE8: C41.2 U18.VDDCORE
VDDCORE9: C46.2 U20.VDDCORE
VIN: C5.1 D2.A F1.2 U1.1 U1.3
VIN1: C10.1 D4.A F2.2 U2.1 U2.3
VIN2: C15.1 D6.A F3.2 U5.1 U5.3
VIN3: C20.1 D8.A F4.2 U7.1 U7.3
VIN4: C25.1 D10.A F5.2 U9.1 U9.3
VIN5: C30.1 D12.A F6.2 U11.1 U11.3
VIN6: C35.1 D14.A F7.2 U13.1 U13.3
VIN7: C40.1 D16.A F8.2 U15.1 U15.3
VIN8: C45.1 D18.A F9.2 U17.1 U17.3
VIN9: C50.1 D20.A F10.2 U19.1 U19.3